# EAGLE board CT_schematic (EAGLE 7.6.0)

Size 100 x 80 mm. Coordinates in mm from the lower left corner, seen from the top.
Outline: 0,0 100,0 100,80 0,80 0,0
Copper layers (1*16): Top 0.035mm / dielectric 1.5mm / Bottom 0.035mm
Design rules "default": minimum track width 10mil, minimum drill 24mil, track to track 8mil, track to pad 8mil, pad to pad 8mil, via to via 8mil, smd to smd 8mil, copper to edge 40mil, drill to drill 8mil, minimum pad ring 10mil, minimum via ring 8mil, stop-mask expansion 4mil, vias tented up to drill 0mil, thermal gap 10mil

## Footprints (pad centres in the part's own frame; a part is rotated, then mirrored left to right if it is on the bottom)
C0603 = smd 0.8 x 0.8: 1 -0.762,0; 2 0.762,0
C0402 = smd 0.5 x 0.5: 1 -0.508,0; 2 0.508,0
C0805 = smd 1.2 x 1.3: 1 -1.016,0; 2 1.016,0
C1206 = smd 1.3 x 1.6: 1 -1.524,0; 2 1.524,0
L0603 = smd 0.8 x 0.8: 1 -0.762,0; 2 0.762,0
L1210 = smd 1.2 x 2.5: 1 -1.524,0; 2 1.524,0
DR1040 = smd 1.6 x 3.2: 1 -4.458,0; 2 4.458,0
R0603 = smd 0.8 x 0.8: 1 -0.762,0; 2 0.762,0
UFQFPN48 = smd 0.559 x 0.305: 1 -3.375,2.751; 2 -3.375,2.251; 3 -3.375,1.75; 4 -3.375,1.25; 5 -3.375,0.75; 6 -3.375,0.25; 7 -3.375,-0.25; 8 -3.375,-0.75; 9 -3.375,-1.25; 10 -3.375,-1.75; 11 -3.375,-2.251; 12 -3.375,-2.751; 25 3.375,-2.751; 26 3.375,-2.251; 27 3.375,-1.75; 28 3.375,-1.25; 29 3.375,-0.75; 30 3.375,-0.25; 31 3.375,0.25; 32 3.375,0.75; 33 3.375,1.25; 34 3.375,1.75; 35 3.375,2.251; 36 3.375,2.751 | smd 0.305 x 0.559: 13 -2.751,-3.375; 14 -2.251,-3.375; 15 -1.75,-3.375; 16 -1.25,-3.375; 17 -0.75,-3.375; 18 -0.25,-3.375; 19 0.25,-3.375; 20 0.75,-3.375; 21 1.25,-3.375; 22 1.75,-3.375; 23 2.251,-3.375; 24 2.751,-3.375; 37 2.751,3.375; 38 2.251,3.375; 39 1.75,3.375; 40 1.25,3.375; 41 0.75,3.375; 42 0.25,3.375; 43 -0.25,3.375; 44 -0.75,3.375; 45 -1.25,3.375; 46 -1.75,3.375; 47 -2.251,3.375; 48 -2.751,3.375 | smd 5.588 x 5.588: 49 0,0
SOIC-8 = smd 1.6 x 0.6: 1 -2.7,1.905 | smd 1.55 x 0.6: 2 -2.7,0.635; 3 -2.7,-0.635; 4 -2.7,-1.905; 5 2.7,-1.905; 6 2.7,-0.635; 7 2.7,0.635; 8 2.7,1.905
SSOP-20 = smd 1.651 x 0.432: 1 -3.48,2.925; 2 -3.48,2.275; 3 -3.48,1.625; 4 -3.48,0.975; 5 -3.48,0.325; 6 -3.48,-0.325; 7 -3.48,-0.975; 8 -3.48,-1.625; 9 -3.48,-2.275; 10 -3.48,-2.925; 11 3.48,-2.925; 12 3.48,-2.275; 13 3.48,-1.625; 14 3.48,-0.975; 15 3.48,-0.325; 16 3.48,0.325; 17 3.48,0.975; 18 3.48,1.625; 19 3.48,2.275; 20 3.48,2.925
HTSS-105-01-G-D = drill 1 pad 1.8 square: 1 0,0 | drill 1 pad 1.8: 2 0,2.54; 3 2.54,0; 4 2.54,2.54; 5 5.08,0; 6 5.08,2.54; 7 7.62,0; 8 7.62,2.54; 9 10.16,0; 10 10.16,2.54
TDFN-8/6MM = smd 0.3 x 0.75: 1 0,0; 2 0.5,0; 3 1,0; 4 1.5,0; 5 1.5,3; 6 1,3; 7 0.5,3; 8 0,3
FCI_10118193-0001LF = smd 0.4 x 1.35: 1 -1.3,2.675; 2 -0.65,2.675; 3 0,2.675; 4 0.65,2.675; 5 1.3,2.675 | smd 1.6 x 1.4: 6 -3.2,2.45; 7 3.2,2.45 | smd 1.9 x 1.9: 8 -1.2,0; 9 1.2,0 | hole 0.5: -3.3,0; 3.3,0
SOT143B = smd 1 x 0.7: 1 -0.75,-1 | smd 0.6 x 0.7: 2 0.95,-1; 3 0.95,1; 4 -0.95,1
ABLS-25.000MHZ-B2F-T = smd 5.6 x 2.8: 1 -3.81,0; 2 5.69,0
ASEK = smd 1.4 x 1: 1 -1.1,-0.8; 2 1.1,-0.8; 3 1.1,0.8; 4 -1.1,0.8
TSOT-23-5 = smd 1.3 x 0.62: 1 -1.31,0.95; 2 -1.31,0; 3 -1.31,-0.95; 4 1.31,-0.95; 5 1.31,0.95
DFN8_2X3MC = smd 0.813 x 0.305: 1 -1.398,0.75; 2 -1.398,0.25; 3 -1.398,-0.25; 4 -1.398,-0.75; 5 1.398,-0.75; 6 1.398,-0.25; 7 1.398,0.25; 8 1.398,0.75 | smd 1.753 x 1.549: 9 0,0
JST-2-SMD = smd 1 x 4.6: 1 -1,-3.7; 2 1,-3.7 | smd 1.6 x 3.4: NC1 -3.4,1.5; NC2 3.4,1.5
SON-6 = smd 0.55 x 0.3: 1 -0.355,0.5 | smd 0.52 x 0.3: 2 -0.37,0; 3 -0.37,-0.5; 4 0.37,-0.5; 5 0.37,0; 6 0.37,0.5
SW_4-1437565-2 = smd 1.4 x 2.1: 1 -2.23,4.55; 2 -2.23,-4.55; 3 2.23,4.55; 4 2.23,-4.55
LGM67K-G1J2-24-Z = smd 0.8 x 1.4: A -2,0; C 0,0
NC7SZ125M5X = smd 1.3 x 0.7: 1 -1.3,0.95; 2 -1.3,0; 3 -1.3,-0.95; 4 1.3,-0.95; 5 1.3,0.95

## Placement (x,y rotation side)
C1  1e-07  [C0603]  -33.02,53.34 0 top  (outside the outline)
C2  1e-07  [C0603]  -36.83,53.34 0 top  (outside the outline)
C3  1e-07  [C0603]  -40.64,53.34 0 top  (outside the outline)
C4  1e-07  [C0603]  -44.45,53.34 0 top  (outside the outline)
C5  4.7e-06  [C0603]  -29.21,53.34 0 top  (outside the outline)
C6  1e-07  [C0603]  -48.26,53.34 0 top  (outside the outline)
C7  1e-08  [C0603]  -52.07,53.34 0 top  (outside the outline)
C8  1e-06  [C0603]  -55.88,53.34 0 top  (outside the outline)
C9  1e-11  [C0402]  -49.53,58.42 0 top  (outside the outline)
C10  1e-11  [C0402]  -53.34,58.42 0 top  (outside the outline)
C11  1e-08  [C0402]  -57.15,58.42 0 top  (outside the outline)
C12  1e-06  [C0603]  -59.69,53.34 0 top  (outside the outline)
C13  1e-06  [C0603]  -63.5,53.34 0 top  (outside the outline)
C14  1e-06  [C0603]  -15.24,58.42 0 top  (outside the outline)
C15  4.7e-06  [C0805]  -21.59,41.91 0 top  (outside the outline)
C16  1e-08  [C0402]  -60.96,58.42 0 top  (outside the outline)
C17  1e-08  [C0402]  -64.77,58.42 0 top  (outside the outline)
C18  1e-05  [C0805]  -26.67,41.91 0 top  (outside the outline)
C19  1e-05  [C0805]  -31.75,41.91 0 top  (outside the outline)
C20  1e-07  [C0402]  -15.24,63.5 0 top  (outside the outline)
C21  1e-05  [C1206]  -55.88,35.56 0 top  (outside the outline)
C22  1e-05  [C1206]  -62.23,35.56 0 top  (outside the outline)
C23  1e-08  [C0402]  -19.05,63.5 0 top  (outside the outline)
F1  240.0  [L0603]  -19.05,58.42 0 top  (outside the outline)
I1  1.5e-05  [L1210]  -49.53,35.56 0 top  (outside the outline)
I2  2.5e-06  [DR1040]  -38.1,6.35 0 top  (outside the outline)
R1  10000.0  [R0603]  -25.4,48.26 0 top  (outside the outline)
R2  1000.0  [R0603]  -22.86,58.42 0 top  (outside the outline)
R3  1600.5  [R0603]  -26.67,58.42 0 top  (outside the outline)
R4  4700.0  [R0603]  -30.48,58.42 0 top  (outside the outline)
R5  2200.0  [R0603]  -34.29,58.42 0 top  (outside the outline)
R6  2200.0  [R0603]  -38.1,58.42 0 top  (outside the outline)
R7  10000.0  [R0603]  -30.48,48.26 0 top  (outside the outline)
R8  10000.0  [R0603]  -35.56,48.26 0 top  (outside the outline)
R9  10000.0  [R0603]  -40.64,48.26 0 top  (outside the outline)
R10  10000.0  [R0603]  -45.72,48.26 0 top  (outside the outline)
R11  100000.0  [R0603]  -49.53,41.91 0 top  (outside the outline)
R12  100000.0  [R0603]  -54.61,41.91 0 top  (outside the outline)
R13  100000.0  [R0603]  -59.69,41.91 0 top  (outside the outline)
R14  10000.0  [R0603]  -50.8,48.26 0 top  (outside the outline)
R15  10000.0  [R0603]  -55.88,48.26 0 top  (outside the outline)
R16  10000.0  [R0603]  -60.96,48.26 0 top  (outside the outline)
R17  220000.0  [R0603]  -64.77,41.91 0 top  (outside the outline)
R18  1000000.0  [R0603]  -44.45,41.91 0 top  (outside the outline)
R19  10000.0  [R0603]  -15.24,53.34 0 top  (outside the outline)
R20  10000.0  [R0603]  -20.32,53.34 0 top  (outside the outline)
R21  9100.0  [R0603]  -41.91,58.42 0 top  (outside the outline)
R22  680000.0  [R0603]  -15.24,48.26 0 top  (outside the outline)
R23  120000.0  [R0603]  -20.32,48.26 0 top  (outside the outline)
R24  2000.0  [R0603]  -45.72,58.42 0 top  (outside the outline)
R25  10000.0  [R0603]  -25.4,53.34 0 top  (outside the outline)
U1  STM32L151CCU6  [UFQFPN48]  -27.94,26.67 0 top  (outside the outline)
U2  AT25020B-SSHL-T  [SOIC-8]  -58.42,17.78 0 top  (outside the outline)
U3  MAX3218EAP+T  [SSOP-20]  -17.78,26.67 0 top  (outside the outline)
U4  HTSS-105-01-G-D  [HTSS-105-01-G-D]  -27.94,16.51 0 top  (outside the outline)
U5  24AA32AT-I/MNY  [TDFN-8/6MM]  -43.18,16.51 0 top  (outside the outline)
U6  10118193-0001LF  [FCI_10118193-0001LF]  -39.37,26.67 0 top  (outside the outline)
U7  prtr5v0u2ax  [SOT143B]  -31.75,63.5 0 top  (outside the outline)
U8  ABLS-25.000MHZ-B2F-T  [ABLS-25.000MHZ-B2F-T]  -26.67,35.56 0 top  (outside the outline)
U9  ASEK-32.768KHz-ECST  [ASEK]  -60.96,26.67 0 top  (outside the outline)
U10  ltc3406es5  [TSOT-23-5]  -36.83,41.91 0 top  (outside the outline)
U11  MCP73831T-2ACI/MC  [DFN8_2X3MC]  -41.91,62.23 0 top  (outside the outline)
U12  S2B-PH-SM4-TB(LF)(SN)  [JST-2-SMD]  -53.34,6.35 0 top  (outside the outline)
U13  TPS3895ADRYR  [SON-6]  -35.56,62.23 0 top  (outside the outline)
U14  4-1437565-2  [SW_4-1437565-2]  -27.94,6.35 0 top  (outside the outline)
U15  Q65110A2395  [LGM67K-G1J2-24-Z]  -38.1,35.56 0 top  (outside the outline)
U16  nc7sz125m5x  [NC7SZ125M5X]  -15.24,41.91 0 top  (outside the outline)

## Library data of the parts
C1-C23 F1 I1 I2 R1-R25 U1-U16 = circuit_tree

## Nets
CLK_CRYSTAL_U1_5: C9.1 U1.5 U8.1
CLK_CRYSTAL_U1_6: C10.1 U1.6 U8.2
CLK_U1_3: U1.3 U9.3
GND: C1.2 C2.2 C3.2 C4.2 C5.2 C6.2 C7.2 C8.2 C9.2 C10.2 C11.2 C12.2 C13.2 C14.2 C16.2 C17.2 C18.2 C19.1 C19.2 C20.2 C21.2 C22.2 C23.2 R2.2 R7.2 R14.2 R17.2 R21.2 R23.2 R24.2 U1.8 U1.23 U1.35 U1.47 U1.49 U2.4 U3.5 U3.17 U3.20 U4.9 U5.4 U6.5 U6.6 U6.7 U6.8 U6.9 U7.1 U9.2 U10.2 U11.6 U11.9 U12.2 U13.2 U15.C U16.1 U16.3
INPUT_USBPOWER_5V: C21.1 R25.2 U6.1 U7.4 U11.1 U11.2
NET_U1_1: C6.1 U1.1
NET_U1_7: R4.1 U1.7 U16.4
NET_U1_9: C7.1 C8.1 F1.1 U1.9
NET_U1_42: R5.1 U1.42 U5.6
NET_U1_43: R6.1 U1.43 U5.5
NET_U1_44: R7.1 U1.44
NET_U1_45: R3.1 U1.45 U15.A
NET_U1_46: R1.1 U1.46 U14.3 U14.4
NET_U2_3: R8.1 U2.3
NET_U2_7: R10.1 U2.7
NET_U3_1: I1.1 U3.1
NET_U3_2: R11.1 U3.2
NET_U3_3: R12.1 U3.3
NET_U3_4: R13.1 U3.4
NET_U3_15: C14.1 U3.15
NET_U3_16: C15.2 U3.16
NET_U3_18: C15.1 U3.18
NET_U3_19: C13.1 U3.19
NET_U4_3: U3.12 U4.3
NET_U4_4: U3.11 U4.4
NET_U4_5: U3.14 U4.5
NET_U4_6: U3.13 U4.6
NET_U5_1: R14.1 U5.1
NET_U5_2: R15.1 U5.2
NET_U5_3: R16.1 U5.3
NET_U10_1: U10.1
NET_U10_3: I2.1 U10.3
NET_U10_5: R17.1 R18.1 U10.5
NET_U10_ATNET_3: I2.2 R18.2
NET_U11_5: R25.1 U11.5
NET_U11_8: R24.1 U11.8
NET_U13_1: R20.1 R21.1 U13.1
NET_U13_3: R22.2 R23.1 U13.3
NET_U13_4: R19.1 U13.4 U16.2
NET_U14_1: R2.1 U14.1 U14.2
PROC_SPI1_MISO: U1.16 U2.2
PROC_SPI1_MOSI: U1.17 U2.5
PROC_SPI1_NSS: R9.1 U1.14 U2.1
PROC_SPI1_SCK: U1.15 U2.6
PROC_USART2_CTS: U1.10 U3.8
PROC_USART2_RTS: U1.11 U3.10
PROC_USART2_RX: U1.13 U3.9
PROC_USART2_TX: U1.12 U3.7
PROC_USB_DM: U1.32 U6.2 U7.3
PROC_USB_DP: U1.33 U6.3 U7.2
VCC_S1_3V7: C18.1 C22.1 U10.4 U11.3 U11.4 U12.1
VCC_TIER1_3V3: C1.1 C2.1 C3.1 C4.1 C5.1 C11.1 C12.1 C16.1 C17.1 C19.2 C20.1 C23.1 F1.2 I1.2 I2.2 R1.2 R3.2 R4.2 R5.2 R6.2 R8.2 R9.2 R10.2 R11.2 R12.2 R13.2 R15.2 R16.2 R18.2 R19.2 R20.2 R22.1 U1.24 U1.36 U1.48 U2.8 U3.6 U5.7 U5.8 U9.4 U13.6 U16.5

## Tracks (layer width: path | path; a pad name or v marks a point on that pad's centre or on a via)
CLK_CRYSTAL_U1_5  (2 unrouted)
CLK_CRYSTAL_U1_6  (2 unrouted)
CLK_U1_3  (1 unrouted)
GND  (55 unrouted)
INPUT_USBPOWER_5V  (5 unrouted)
NET_U1_1  (1 unrouted)
NET_U1_7  (2 unrouted)
NET_U1_9  (3 unrouted)
NET_U1_42  (2 unrouted)
NET_U1_43  (2 unrouted)
NET_U1_44  (1 unrouted)
NET_U1_45  (2 unrouted)
NET_U1_46  (3 unrouted)
NET_U2_3  (1 unrouted)
NET_U2_7  (1 unrouted)
NET_U3_1  (1 unrouted)
NET_U3_2  (1 unrouted)
NET_U3_3  (1 unrouted)
NET_U3_4  (1 unrouted)
NET_U3_15  (1 unrouted)
NET_U3_16  (1 unrouted)
NET_U3_18  (1 unrouted)
NET_U3_19  (1 unrouted)
NET_U4_3  (1 unrouted)
NET_U4_4  (1 unrouted)
NET_U4_5  (1 unrouted)
NET_U4_6  (1 unrouted)
NET_U5_1  (1 unrouted)
NET_U5_2  (1 unrouted)
NET_U5_3  (1 unrouted)
NET_U10_3  (1 unrouted)
NET_U10_5  (2 unrouted)
NET_U10_ATNET_3  (1 unrouted)
NET_U11_5  (1 unrouted)
NET_U11_8  (1 unrouted)
NET_U13_1  (2 unrouted)
NET_U13_3  (2 unrouted)
NET_U13_4  (2 unrouted)
NET_U14_1  (2 unrouted)
PROC_SPI1_MISO  (1 unrouted)
PROC_SPI1_MOSI  (1 unrouted)
PROC_SPI1_NSS  (2 unrouted)
PROC_SPI1_SCK  (1 unrouted)
PROC_USART2_CTS  (1 unrouted)
PROC_USART2_RTS  (1 unrouted)
PROC_USART2_RX  (1 unrouted)
PROC_USART2_TX  (1 unrouted)
PROC_USB_DM  (2 unrouted)
PROC_USB_DP  (2 unrouted)
VCC_S1_3V7  (5 unrouted)
VCC_TIER1_3V3  (41 unrouted)